# Altium PCB PCB.PcbDoc
Units mm, origin at the board's own origin, x right, y up, seen from the top; angles counter-clockwise.
Board outline 152.4 x 101.6 mm, 4 copper layers (Top Layer, Signal Layer 1, Signal Layer 2, Bottom Layer), stack 0.778 mm thick; 87 components, 52 nets, 316 pads, 98 vias.
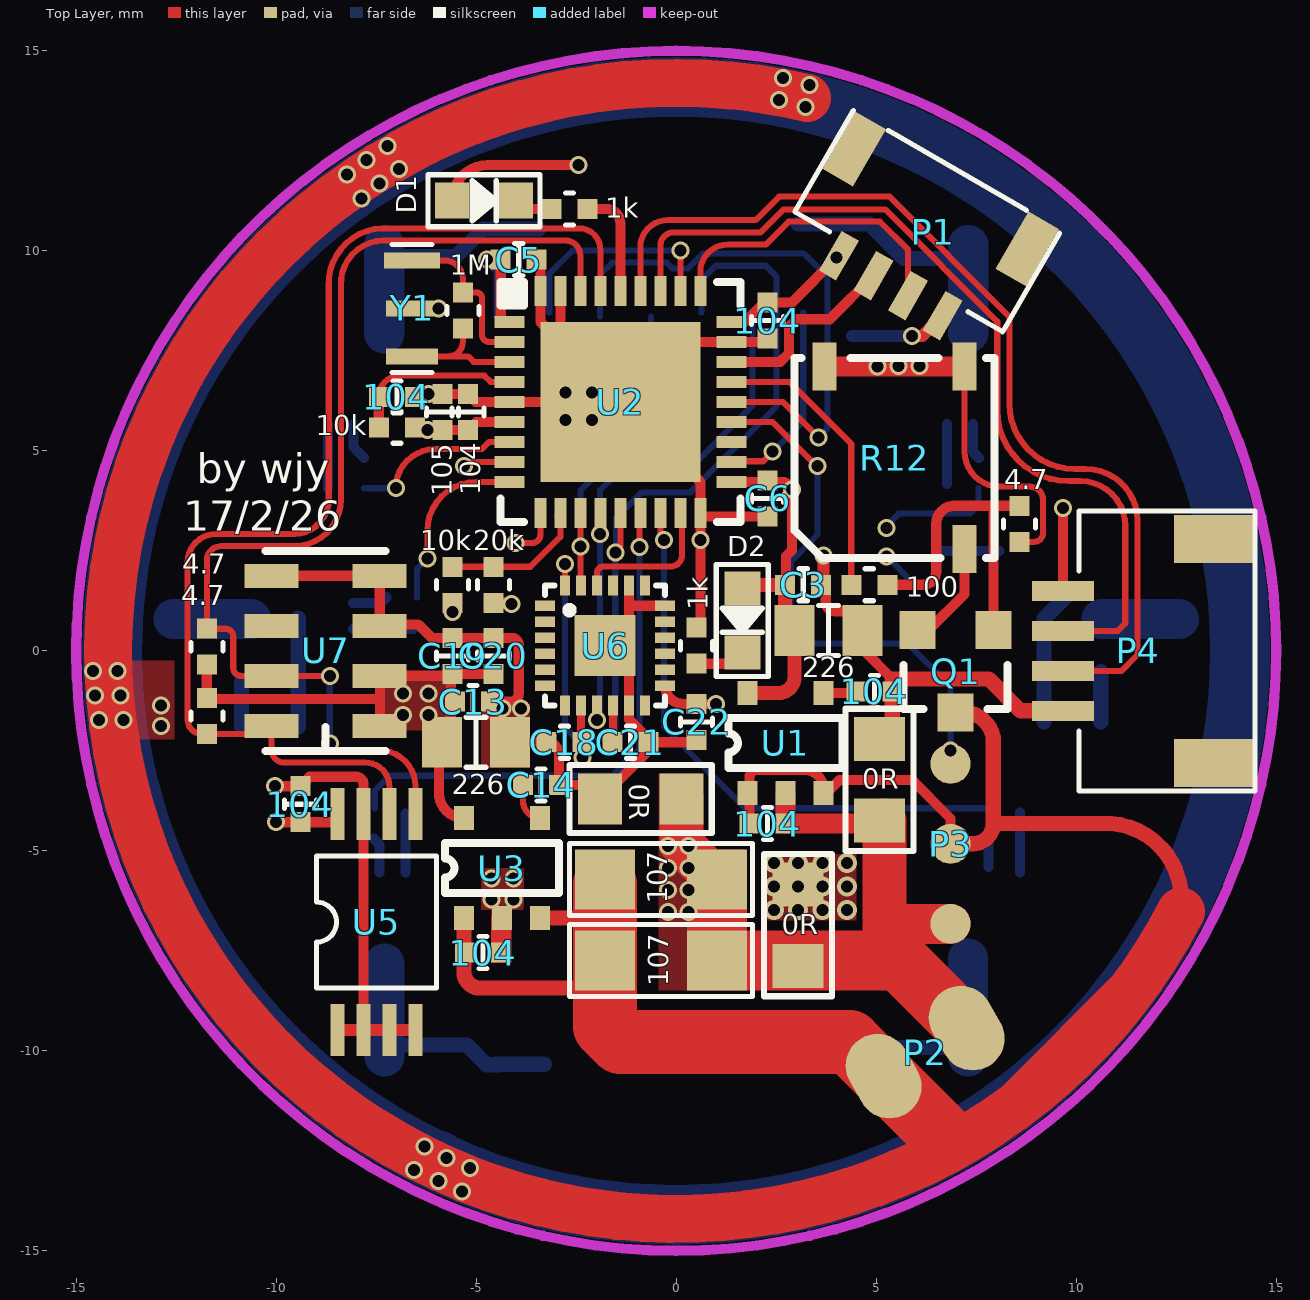
[diagram p0: Top Layer view]
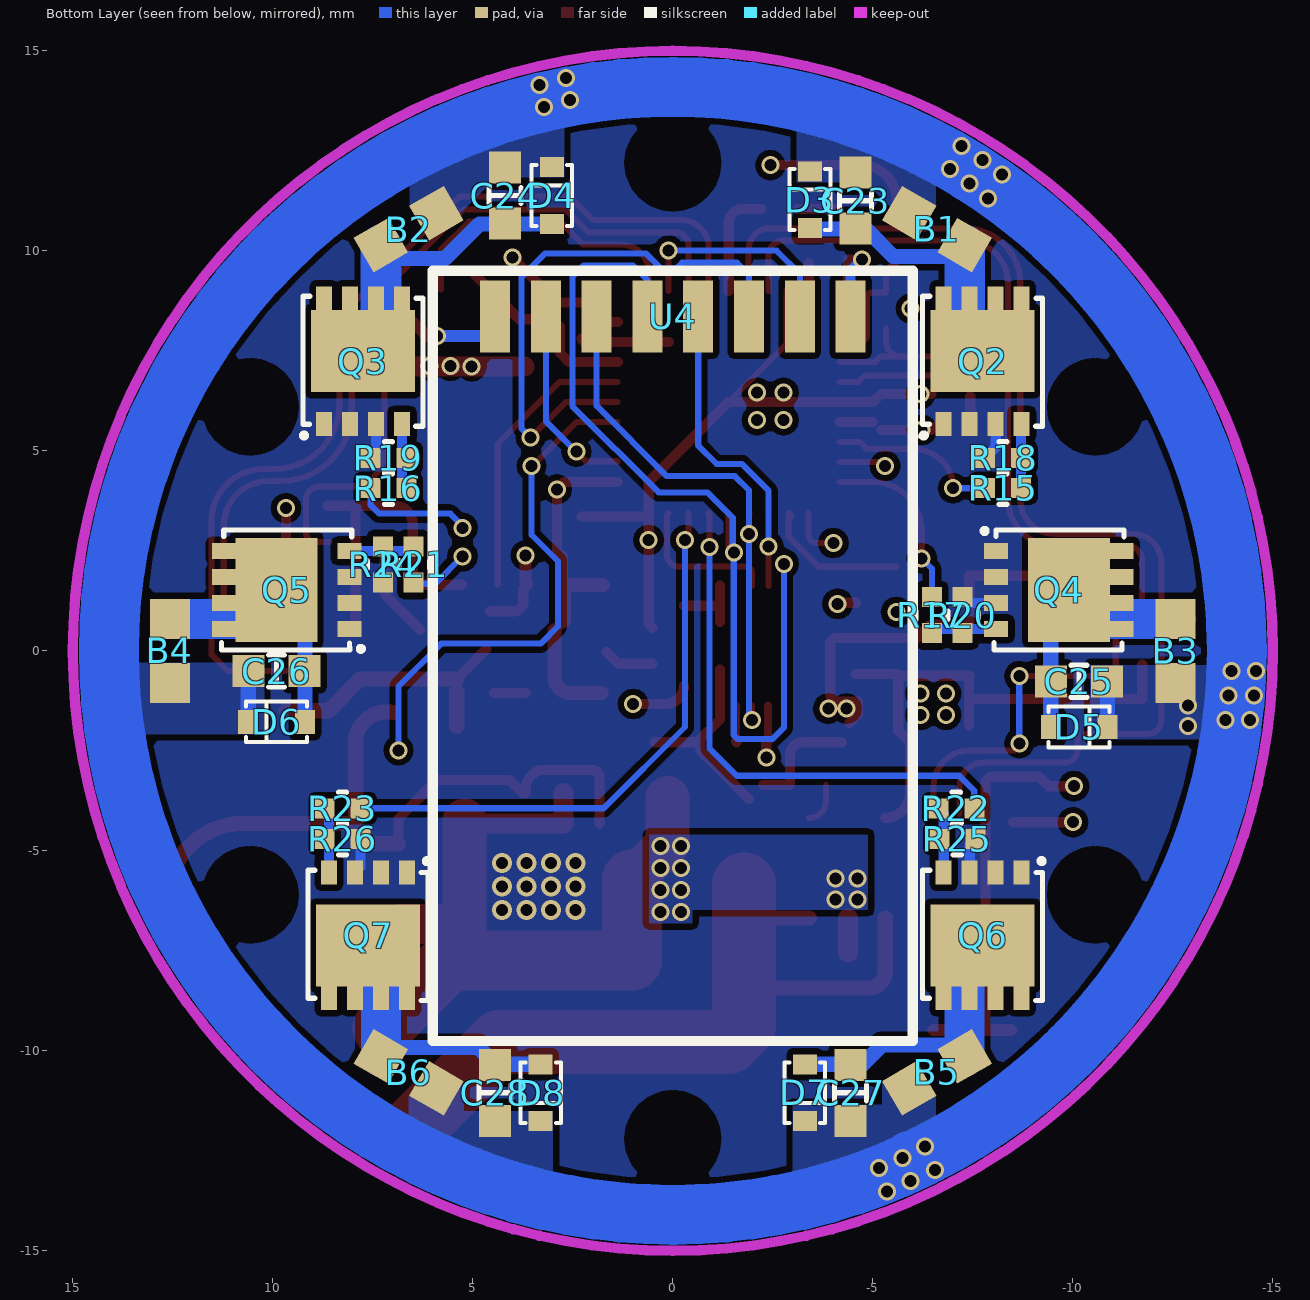
[diagram p1: Bottom Layer view, seen from below]
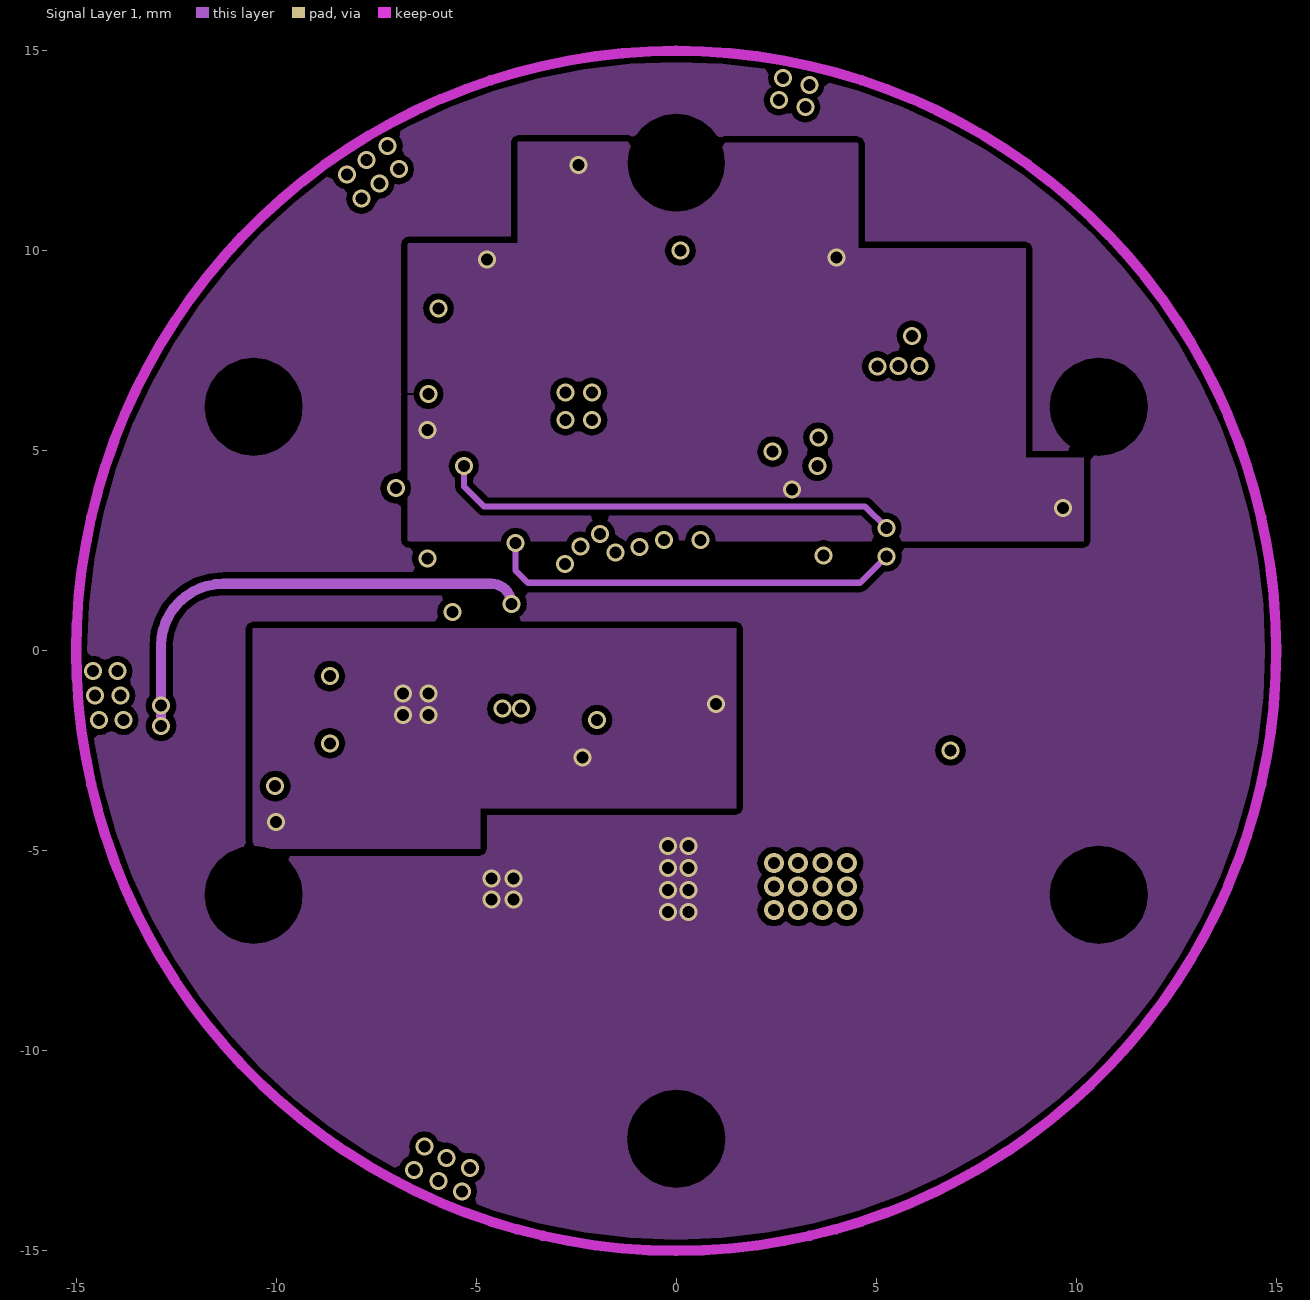
[diagram p2: Signal Layer 1]
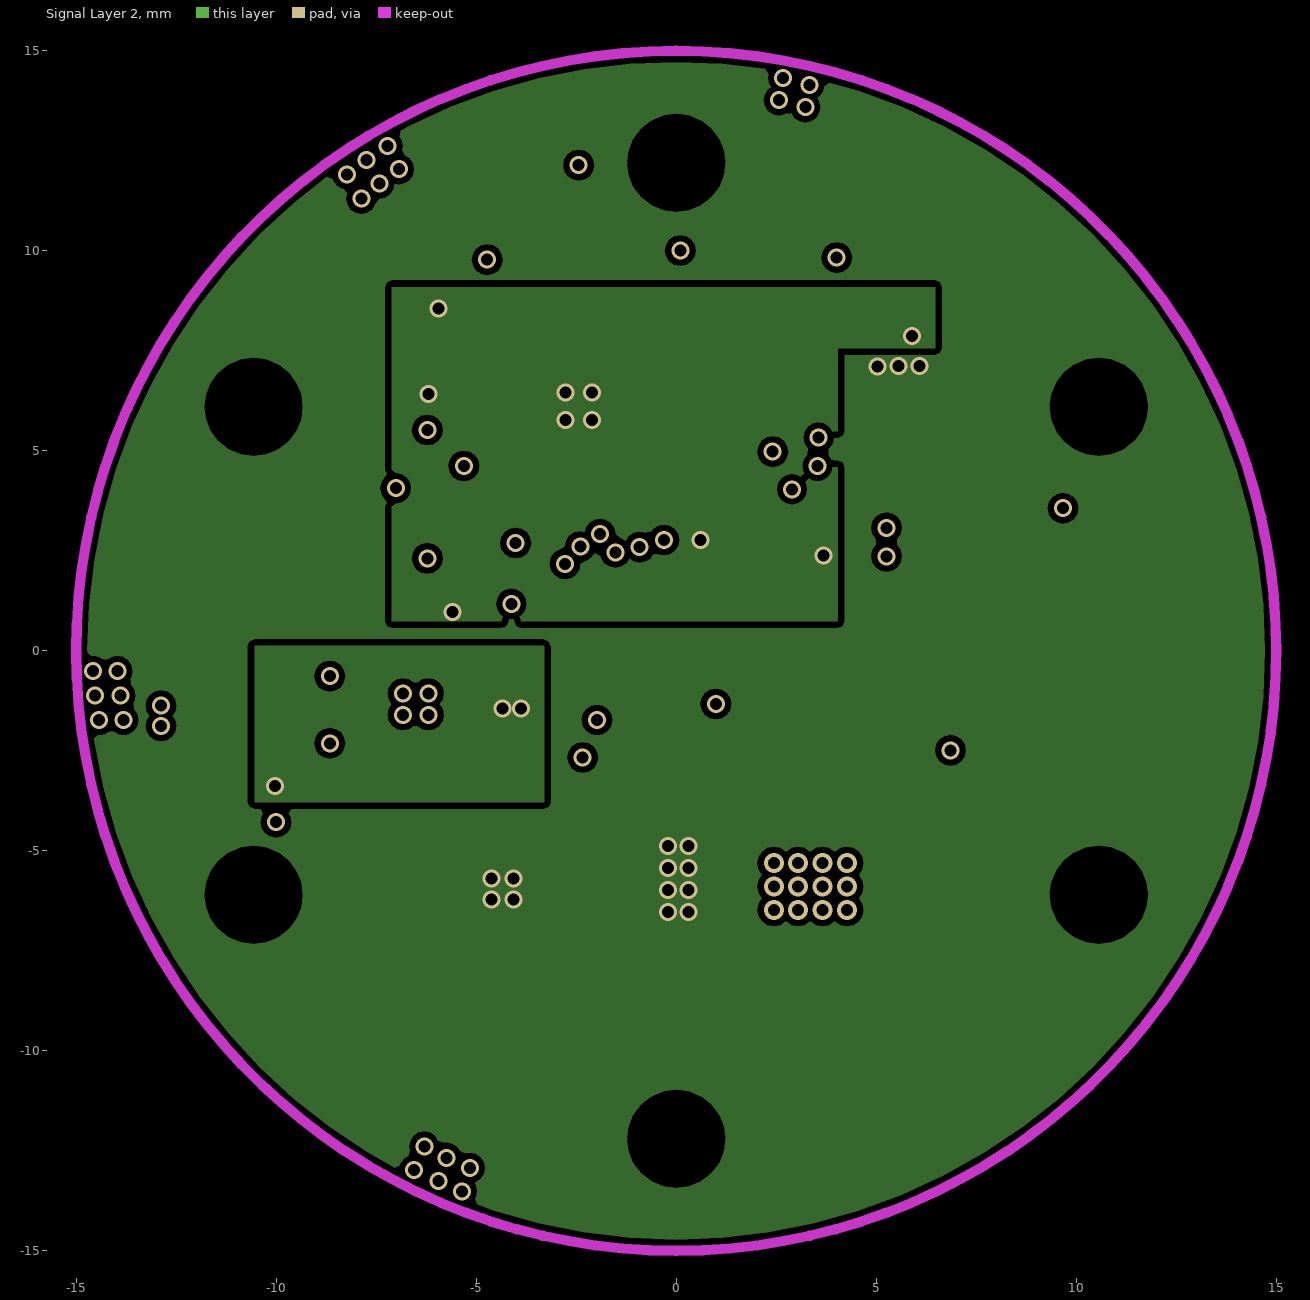
[diagram p3: Signal Layer 2]

## Layer stack, top to bottom
Top Solder: solder mask 0.0102, Solder Resist, Dk 3.5
Top Layer: signal copper 0.0356
Dielectric 1: core 0.254, FR-4, Dk 4.2
Signal Layer 1: signal copper 0.036
Dielectric 3: prepreg 0.127, Dk 4.2
Signal Layer 2: signal copper 0.036
Dielectric 2: core 0.254, Dk 4.2
Bottom Layer: signal copper 0.0356
Bottom Solder: solder mask 0.0102, Solder Resist, Dk 3.5

## Board outline
-218.567,-43.688 -66.167,-43.688 -66.167,57.912 -218.567,57.912

## Design rules (kind name [scope] priority, off if disabled: settings)
Clearance [All] p1: gap=0.152 ignorepadtopadclearanceinfootprint=FALSE except(0: Arc-Hole Track-Hole SMDPad-Hole THPad-Hole Via-Hole Fill-Hole Poly-Hole Region-Hole Text-Hole)
PolygonConnect [All] p1: connectstyle=Direct reliefconductorwidth=0.254 reliefentries=4 polygonreliefangle="90 Angle" airgapwidth=0.254
RoutingVias [All] p1: holewidth=0.3 width=0.5 viastyle="Through Hole" minholewidth=0.3 minwidth=0.4 maxholewidth=0.3 maxwidth=0.5
SolderMaskExpansion [All] p1: expansion=0.102
Width [All] p1: maxlimit=2 minlimit=0.152 preferedwidth=0.254
30 further rules are at their usual default settings.

## Classes and differential pairs
component class MCU: 0R 1K 1k 1M 4.7 10k 20k 100 104 105 107 226 C1 C3 C5 C6 C13 C14 C18 C19 C20 C21 C22 D1 D2 P1 P2 P3 P4 Q1 R12 U1 U2 U3 U4 U5 U6 U7 Y1
component class MOTOR: B1 B2 B3 B4 B5 B6 C23 C24 C25 C26 C27 C28 D3 D4 D5 D6 D7 D8 Q2 Q3 Q4 Q5 Q6 Q7 R15 R16 R17 R18 R19 R20 R21 R22 R23 R24 R25 R26

## Components (designator, comment, footprint, x,y, rotation, side; value= is the part's Value field where it differs from the comment)
0R "Res1" 0805R 5.08,-3.226 r90 top value=0R (schematic designator R6)
0R "Res1" 0805R 3.048,-6.858 r90 top value=0R (schematic designator R8)
0R "Res1" 0805R -0.889,-3.708 r180 top value=0R (schematic designator R7)
1k "Res1" R0402 0.508,0.127 r90 top value=1K (schematic designator R3)
1k "Res1" R0402 -2.667,11.049 r0 top value=1K (schematic designator R2)
1M "Res1" R0402 -5.334,8.509 r90 top value=1M (schematic designator R1)
4.7 "Res1" R0402 -11.735,0.102 r270 top value=4.7K (schematic designator R14)
4.7 "Res1" R0402 -11.735,-1.626 r90 top value=4.7K (schematic designator R13)
4.7 "Res1" R0402 8.585,3.175 r90 top value=10K (schematic designator R11)
10k "Res1" R0402 -5.588,1.651 r90 top value=10K (schematic designator R9)
10k "Res1" R0402 -6.985,5.588 r0 top value=10K (schematic designator R4)
20k "Res1" R0402 -4.572,1.651 r270 top value=20K (schematic designator R5)
100 "Res1" R0402 4.826,1.651 r0 top value=100R (schematic designator R10)
104 "Cap" C0402 -9.398,-3.835 r270 top value=100nF (schematic designator C15)
104 "Cap" C0402 -6.985,6.35 r180 top value=100nF (schematic designator C12)
104 "Cap" C0402 -4.826,-7.544 r180 top value=104 (schematic designator C10)
104 "Cap" C0402 -5.207,5.969 r270 top value=1uF (schematic designator C9)
104 "Cap" C0402 2.286,8.255 r90 top value=100nF (schematic designator C7)
104 "Cap" C0402 4.953,-1.016 r180 top value=104 (schematic designator C4)
104 "Cap" C0402 2.286,-4.318 r180 top value=104 (schematic designator C1)
105 "Cap" C0402 -5.842,5.969 r270 top value=100nF (schematic designator C8)
107 "Cap" 1206R -0.381,-7.747 r180 top value=107 (schematic designator C17)
107 "Cap" 1206R -0.381,-5.715 r180 top value=107 (schematic designator C16)
226 "Cap Pol1" C0805 -5.004,-2.286 r0 top value=22uF (schematic designator C11)
226 "Cap Pol1" C0805 3.81,0.508 r0 top value=22uF (schematic designator C2)
B1 "Motor" MOTORPAD1 -6.604,10.541 r210 bottom
B2 "Motor" MOTORPAD1 6.604,10.541 r330 bottom
B3 "Motor" MOTORPAD1 -12.573,0 r90 bottom
B4 "Motor" MOTORPAD1 12.573,0 r90 bottom
B5 "Motor" MOTORPAD1 -6.604,-10.541 r150 bottom
B6 "Motor" MOTORPAD1 6.604,-10.541 r30 bottom
C3 "Cap" C0402 3.175,1.651 r180 top value=104
C5 "Cap" C0402 -3.937,9.779 r180 top value=100nF
C6 "Cap" C0402 2.286,3.81 r90 top value=100nF
C13 "Cap" C0402 -5.08,-1.27 r180 top value=104
C14 "Cap" C0402 -3.378,-3.353 r180 top value=104
C18 "Cap" C0402 -2.794,-2.286 r180 top value=10nF
C19 "Cap" C0402 -5.588,-0.127 r270 top value=100nF
C20 "Cap" C0402 -4.572,-0.127 r270 top value=100pF
C21 "Cap" C0402 -1.143,-2.286 r180 top value=100nF
C22 "Cap" C0402 0.508,-1.778 r90 top value=100nF
C23 "Cap" c0603 -4.572,11.252 r90 bottom value=0.1uF
C24 "Cap" c0603 4.191,11.379 r90 bottom value=0.1uF
C25 "Cap" c0603 -10.16,-0.762 r180 bottom value=0.1uF
C26 "Cap" c0603 9.906,-0.508 r0 bottom value=0.1uF
C27 "Cap" c0603 -4.445,-11.049 r270 bottom value=0.1uF
C28 "Cap" c0603 4.445,-11.049 r270 bottom value=0.1uF
D1 "LED0" 0603D -4.801,11.252 r0 top
D2 "LED0" 0603D 1.651,0.762 r270 top
D3 "Diode 1N4148" SOD-523 -3.429,11.278 r270 bottom
D4 "Diode 1N4148" SOD-523 3.023,11.379 r270 bottom
D5 "Diode 1N4148" SOD-523 -10.16,-1.905 r0 bottom
D6 "Diode 1N4148" SOD-523 9.906,-1.778 r180 bottom
D7 "Diode 1N4148" SOD-523 -3.302,-11.049 r90 bottom
D8 "Diode 1N4148" SOD-523 3.302,-11.049 r90 bottom
P1 "Header 4" 1.0*4PIN/SMD 4.064,9.881 r330 top
P2 "Header 2" BATPAD 6.223,-10.033 r30 top
P3 "Header 3" PPMPAD 6.858,-4.826 r90 top
P4 "Header 4" "1.0*4PIN/SMD h" 11.557,0 r270 top
Q1 "NMOS-2" SOT23 6.985,-0.508 r180 top
Q2 "NMOS-2" "WDFN8 3.3*3.3,0.65P" -7.747,7.239 r180 bottom
Q3 "NMOS-2" "WDFN8 3.3*3.3,0.65P" 7.747,7.239 r180 bottom
Q4 "NMOS-2" "WDFN8 3.3*3.3,0.65P" -9.652,1.524 r270 bottom
Q5 "NMOS-2" "WDFN8 3.3*3.3,0.65P" 9.652,1.524 r90 bottom
Q6 "NMOS-2" "WDFN8 3.3*3.3,0.65P" -7.747,-7.112 r0 bottom
Q7 "NMOS-2" "WDFN8 3.3*3.3,0.65P" 7.62,-7.112 r0 bottom
R12 "Res1" BUZZER5X5 5.461,4.826 r90 top value=BUZZER
R15 "Res1" R0402 -8.255,4.064 r180 bottom value=10R
R16 "Res1" R0402 7.112,4.064 r180 bottom value=10R
R17 "Res1" R0402 -6.477,0.889 r270 bottom value=10R
R18 "Res1" R0402 -8.255,4.826 r0 bottom value=10K
R19 "Res1" R0402 7.112,4.826 r0 bottom value=10K
R20 "Res1" R0402 -7.239,0.889 r90 bottom value=10K
R21 "Res1" R0402 6.477,2.159 r90 bottom value=10R
R22 "Res1" R0402 -7.087,-3.937 r0 bottom value=10R
R23 "Res1" R0402 8.255,-3.937 r0 bottom value=10R
R24 "Res1" R0402 7.239,2.159 r270 bottom value=10K
R25 "Res1" R0402 -7.112,-4.699 r180 bottom value=10K
R26 "Res1" R0402 8.255,-4.699 r180 bottom value=10K
U1 "SP6205EM5-3.3" SOT-23-5 1.778,-3.556 r90 top
U2 "STM32F103T8U6" VFQFPN36 -1.397,6.223 r0 top
U3 "SP6205EM5-3.3" SOT-23-5 -5.309,-6.68 r90 top
U4 "NRF2401_SMD" NRF2401_SMD 0,9.246 r0 bottom
U5 "AT24C16" TSSOP8 -7.493,-6.782 r90 top
U6 "MPU9250" QFN24-3X3 -1.778,0.127 r0 top
U7 "MS5611" MS5611 -8.763,0 r180 top
Y1 "XTAL(3213)" Y3213 -6.604,8.56 r0 top

## Footprints (in the part's own frame and the unit in brackets; to place one, negate y for a bottom-side part, rotate by r counter-clockwise, add the part's x,y. Pads: shape width x height; smd on the part's side, far side on the other; paste and mask are expansions set on the pad)
1.0*4PIN/SMD [mm]
  rect 0.5x1.143 smd: 1(0,0) 2(1,0) 3(2,0) 4(3,0)
  rect 0.889x1.651 smd: 5(-1,2.5) 6(4,2.5)
  silkscreen extent -1.5,0.4 4.5,3.32
"1.0*4PIN/SMD h" [mm]
  rect 0.5x1.55 smd: 1(-1.5,-1.887) 2(-0.5,-1.887) 3(0.5,-1.887) 4(1.5,-1.887)
  rect 1.2x2 smd: 5(-2.8,1.887) 6(2.8,1.887)
  silkscreen extent -3.5,-1.49 3.5,2.91, body extent -3.28,-2.07 3.22,2.93, height 3.23
0603D [mm]
  rect 0.85x0.9 smd: 1(-0.8,0) 2(0.8,0)
  silkscreen extent -1.4,-0.65 1.4,0.65, body extent -0.85,-0.4 0.77,0.4, height 1.1
0805R [mm]
  rect 1.1x1.27 smd: 1(-1.016,0) 2(1.016,0)
  silkscreen extent -1.78,-0.85 1.78,0.85
1206R [mm]
  rect 1.5x1.5 smd: 1(-1.397,0) 2(1.397,0)
  silkscreen extent -2.29,-0.9 2.29,0.9, body extent -1.72,-0.79 1.48,0.81, height 0.95
BATPAD [mm]
  oval 1.6x2.2 smd: 1(-1.2,0) 2(1.2,0)
BUZZER5X5 [mm]
  rect 1.2x0.6 smd: 1(-2.286,-1.75) 2(2.286,-1.75) 2(2.286,1.75)
  silkscreen extent -2.5,-2.5 2.5,2.5
C0402 [mm] "C0402"
  rect 0.5x0.5 smd: 1(-0.45,0) 2(0.45,0)
  silkscreen extent -0.1,-0.4 0.1,0.4, body extent -0.5,-0.25 0.5,0.25, height 0.35
c0603 [mm] "C0603"
  rect 0.8x0.8 smd: 1(-0.7,0) 2(0.7,0)
  silkscreen extent -0.2,-0.4 0.2,0.4, body extent -0.75,-0.4 0.85,0.4, height 0.6
C0805 [mm] "C0805"
  rect 1x1.27 smd: 1(-0.85,0) 2(0.85,0)
  silkscreen extent -0.25,-0.62 0.25,0.62
MOTORPAD1 [mm]
  rect 1x1 smd: 1(-0.8,0) 2(0.8,0)
MS5611 [mm]
  rect 1.35x0.6 smd: 1(-1.35,1.875) 2(-1.35,0.625) 3(-1.35,-0.625) 4(-1.35,-1.875) 5(1.35,-1.875) 6(1.35,-0.625) 7(1.35,0.625) 8(1.35,1.875)
  silkscreen extent -1.5,-2.5 1.5,2.5
NRF2401_SMD [mm]
  rect 0.75x1.8 smd: 1(-4.445,0.889) 2(-3.175,0.889) 3(-1.905,0.889) 4(-0.635,0.889) 5(0.635,0.889) 6(1.905,0.889) 7(3.175,0.889) 8(4.445,0.889)
  silkscreen extent -6,-0.25 6,19
PPMPAD [mm]
  round 1 smd: 1(-2,0) 2(0,0) 3(2,0)
QFN24-3X3 [mm]
  rect 1.524x1.524 smd: 0(0,0)
  rect 0.5x0.254 smd: 1(-1.5,1) 2(-1.5,0.6) 3(-1.5,0.2) 4(-1.5,-0.2) 5(-1.5,-0.6) 6(-1.5,-1) 13(1.5,-1) 14(1.5,-0.6) 15(1.5,-0.2) 16(1.5,0.2) 17(1.5,0.6) 18(1.5,1)
  rect 0.254x0.5 smd: 7(-1,-1.5) 8(-0.6,-1.5) 9(-0.2,-1.5) 10(0.2,-1.5) 11(0.6,-1.5) 12(1,-1.5) 19(1,1.5) 20(0.6,1.5) 21(0.2,1.5) 22(-0.2,1.5) 23(-0.6,1.5) 24(-1,1.5)
  silkscreen extent -1.5,-1.5 1.5,1.5
R0402 [mm] "R0402"
  rect 0.5x0.5 smd: 1(-0.45,0) 2(0.45,0)
  silkscreen extent -0.1,-0.4 0.1,0.4, body extent -0.5,-0.25 0.5,0.25, height 0.35
SOD-523 [mm]
  rect 0.5x0.6 smd: 1(0.71,0) 2(-0.71,0)
  silkscreen extent -0.76,-0.51 0.76,0.51
SOT23 [mm] "SOT-23; 3 Leads; Body 3.1 x 2.5 mm, inc. leads (LxW max), Alternate Lead Configuration"
  rect 0.9x0.95 smd: 1(-0.95,-1.032) 2(0.95,-1.032) 3(0,1.032)
  silkscreen extent -1.3,-0.16 1.3,0.94
SOT-23-5 [mm]
  rect 0.6x0.5 smd: 1(0,0) 2(0,-0.95) 3(0,-1.9) 4(2.5,-1.9) 5(2.5,0)
  silkscreen extent 0.63,-2.38 1.87,0.48, body extent 0.25,-2.45 2.25,0.6, height 0.51
TSSOP8 [mm]
  rect 1.3x0.35 smd: 1(-2.7,0.975) 2(-2.7,0.325) 3(-2.7,-0.325) 4(-2.7,-0.975) 5(2.7,-0.975) 6(2.7,-0.325) 7(2.7,0.325) 8(2.7,0.975)
  silkscreen extent -1.65,-1.5 1.65,1.5
VFQFPN36 [mm]
  rect 4x4 smd: 0(0,0)
  rect 0.75x0.3 smd: 1(-2.775,2) 2(-2.775,1.5) 3(-2.775,1) 4(-2.775,0.5) 5(-2.775,0) 6(-2.775,-0.5) 7(-2.775,-1) 8(-2.775,-1.5) 9(-2.775,-2) 19(2.775,-2) 20(2.775,-1.5) 21(2.775,-1) 22(2.775,-0.5) 23(2.775,0) 24(2.775,0.5) 25(2.775,1) 26(2.775,1.5) 27(2.775,2)
  rect 0.3x0.75 smd: 10(-2,-2.775) 11(-1.5,-2.775) 12(-1,-2.775) 13(-0.5,-2.775) 14(0,-2.775) 15(0.5,-2.775) 16(1,-2.775) 17(1.5,-2.775) 18(2,-2.775) 28(2,2.775) 29(1.5,2.775) 30(1,2.775) 31(0.5,2.775) 32(0,2.775) 33(-0.5,2.775) 34(-1,2.775) 35(-1.5,2.775) 36(-2,2.775)
  silkscreen extent -3,-3 3,3
"WDFN8 3.3*3.3,0.65P" [mm] "EMB06N03V"
  rect 0.4x0.6 smd: 1(0.975,-1.572) 2(-0.975,-1.572) 2(-0.325,-1.572) 2(0.325,-1.572) 3(-0.975,1.572) 3(-0.325,1.572) 3(0.325,1.572) 3(0.975,1.572)
  rect 2.6x2.05 smd: 3(-0.001,0.258)
  silkscreen extent -1.5,-1.88 1.5,1.63, body extent -1.47,-1.47 1.52,1.52, height 0.9
Y3213 [mm]
  rect 1.4x0.4 smd: 1(0,1.2)
  rect 1.3x0.4 smd: 2(0,0) 3(0,-1.2)
  silkscreen extent -0.5,-1.6 0.5,1.6

## Part data
0R 0R 0R 1k 1k 1M 4.7 4.7 4.7 10k 10k 20k 100 R12 R15 R16 R17 R18 R19 R20 R21 R22 R23 R24 R25 R26: "Resistor", LatestRevisionDate=17-Jul-2002, LatestRevisionNote="Re-released for DXP Platform.", PackageReference=AXIAL-0.3, Published=8-Jun-2000, Publisher="Altium Limited"
  0R 0R 0R 1k 1k 1M 10k 10k 20k: PackageDescription="Axial Device, Thru-Hole; 2 Leads; 0.3 in Pin Spacing"
104 104 104 104 104 104 104 105 107 107 C3 C5 C6 C13 C14 C18 C19 C20 C21 C22 C23 C24 C25 C26 C27 C28: "Capacitor", LatestRevisionDate=17-Jul-2002, LatestRevisionNote="Re-released for DXP Platform.", PackageReference=RAD-0.3, Published=8-Jun-2000, Publisher="Altium Limited"
226 226: "Polarized Capacitor (Radial)", LatestRevisionDate=17-Jul-2002, LatestRevisionNote="Re-released for DXP Platform.", PackageReference=RB7.6-15, Published=8-Jun-2000, Publisher="Altium Limited"
B1 B2 B3 B4 B5 B6: "Motor, General Kind", LatestRevisionDate=17-Jul-2002, LatestRevisionNote="Re-released for DXP Platform.", PackageReference=RB5-10.5, Published=24-Mar-1999, Publisher="Altium Limited"
D1 D2: "Typical INFRARED GaAs LED", LatestRevisionDate=08-Jul-2005, LatestRevisionNote="Mech Layer 1 removed.", PackageDescription="LED; 2 Leads", PackageReference=LED-0, Published=8-Jun-2000, Publisher="Altium Limited"
D3 D4 D5 D6 D7 D8: "High Conductance Fast Diode", Code_JEDEC=DO-204-AH, ComponentLink1Description="Manufacturer Link", ComponentLink1URL=http://www.fairchildsemi.com/, ComponentLink2Description=Datasheet, ComponentLink2URL=http://www.fairchildsemi.com/ds/1N%2F1N4148.pdf, DatasheetDocument=1997, LatestRevisionDate=17-Jul-2002, LatestRevisionNote="Re-released for DXP Platform.", PackageReference=DO-35, Published=8-Jun-2000, Publisher="Altium Limited"
P1 P4: "Header, 4-Pin", LatestRevisionDate=17-Jul-2002, LatestRevisionNote="Re-released for DXP Platform.", Publisher="Altium Limited"
P2: "Header, 2-Pin", LatestRevisionDate=17-Jul-2002, LatestRevisionNote="Re-released for DXP Platform.", Publisher="Altium Limited"
P3: "Header, 3-Pin", LatestRevisionDate=17-Jul-2002, LatestRevisionNote="Re-released for DXP Platform.", Publisher="Altium Limited"
Q1 Q2 Q3 Q4 Q5 Q6 Q7: "N-Channel Power MOSFET", Code_JEDEC=TO-220-AB, ComponentLink1Description="Manufacturer Link", ComponentLink1URL=http://www.irf.com/, DatasheetDocument=PD-9.814, LatestRevisionDate=17-Jul-2002, LatestRevisionNote="Re-released for DXP Platform.", Note="Pin 2 is electrically connected to pin 4.", PackageReference=TO-220AB, Published=8-Jun-2000, Publisher="Altium Limited"
U1 U3: library part SP6205, "AD3330"
Y1: "Crystal Oscillator", LatestRevisionDate=17-Jul-2002, LatestRevisionNote="Re-released for DXP Platform.", PackageReference=R38, Published=8-Jun-2000, Publisher="Altium Limited"

## Free pads (board coordinates)
  round 1.524 hole 2.1: 0(-10.566,-6.1) 0(-10.566,6.1) 0(0,-12.2) 0(0,12.2) 0(10.566,-6.1) 0(10.566,6.1)

## Via types
v1: diameter 0.45, hole 0.3, Top Layer to Bottom Layer, 86 vias
v2: diameter 0.5, hole 0.3, Top Layer to Bottom Layer, 12 vias

## Nets (pads, with @x,y where several pads share a name; then routed paths per layer and width w, separated by ;. In a path a pad name is that pad's centre, name@x,y a point inside that pad or via, vN(x,y) a via of type N, cw(c..) or ccw(c..) an arc to the next point about the centre after c; other vN are vias at no path point)
3.3VA: 4.7.2@-11.735,-0.348 4.7.2@-11.735,-1.176 104.2@-9.398,-4.285 226.1@-5.854,-2.286 C13.2 C18.1 C19.2 C20.2 C22.2 U3.5 U5.8 U6.8 U6.13 U7.1 U7.2 | length 17.6
  Top Layer w0.2: C18.1@-2.378,-2.252 U6.8
  Top Layer w0.254: 4.7.2@-11.735,-0.348 -11.735,-1.176 -11.735,-1.204 -7.402,-1.204 ; v1(-10.008,-4.285) -9.398,-4.285 U5.8@-8.509,-4.285 ; U7.2 -5.636,-0.625 -5.636,-1.992 -5.93,-2.286 -5.93,-3.559 ccw(c-5.309,-3.559) U3.5 ; U7.1@-7.402,-1.864 -7.402,-1.204 ; U7.2@-7.402,-0.636 -7.402,-1.204 ; C19.2 C20.2 ; C18.1@-2.378,-2.252 C18.1 -2.337,-2.293 v1(-2.337,-2.667) ; U6.13 ccw(c0.177,-0.873) 0.177,-1.328 C22.2 v1(0.991,-1.328)
  other v1: -6.833,-1.6 -6.198,-1.6 -6.833,-1.067 -6.198,-1.067
3.3VD: 10k.2@-6.535,5.588 104.2@2.286,8.705 104.2@-5.207,5.519 105.2 226.1@2.96,0.508 C3.2 C5.2 C6.2 D1.1 D2.1 P1.1 P4.1 U1.5 U2.1 U2.6 U2.19 U2.27 U4.1 | length 23.4
  Top Layer w0.254: 10k.2@-6.535,5.555 10k.2@-6.535,5.588 ; 10k.2@-6.466,5.519 105.2 104.2@-5.207,5.519 ; D1.1 cw(c-4.712,11.252) -4.712,12.141 v1(-2.438,12.141) ; 104.2@-5.003,5.723 U2.6 ; v1(-4.724,9.779) C5.2 U2.1@-4.387,8.306 ; U2.19 2.711,4.223 v1(2.896,4.039) 2.896,2.515 2.743,2.362 C3.2@2.743,1.669 ; U2.27 1.721,8.223 2.203,8.705 2.286,8.705 2.888,8.705 P1.1 ; 226.1@2.743,0.725 226.1@2.96,0.508 ; P4.1 v1(9.67,3.564)
  Top Layer w0.35: D2.1@1.74,1.651 C3.2 226.1@2.725,0.743 ; U1.5 2.551,-1.056 ccw(c2.551,-0.647) 2.96,-0.647 226.1@2.96,0.508
  Bottom Layer w0.254: v1(-4.724,9.779) -4.445,9.5 U4.1
  other v1: -6.223,5.519 4.013,9.83
AGND: 0R.2@-1.905,-3.708 104.1@-9.398,-3.385 226.2@-4.154,-2.286 C13.1 C14.1 C18.2 C19.1 C20.1 C21.1 C22.1 U5.1 U5.2 U5.3 U5.4 U5.7 U6.0 U6.11 U6.18 U6.20 U7.3 U7.4 U7.5 | length 30.6
  Top Layer w0.254: U7.5 U7.4 U7.3 -7.378,0.66 -6.452,0.66 -6.114,0.323 C19.1 C20.1 -4.108,0.323 cw(c-4.108,0.152) -3.937,0.152 -3.937,-1.067 cw(c-4.14,-1.067) -4.14,-1.27 C13.1 -4.63,-1.593 226.2@-4.42,-1.803 ; v1(-10.026,-3.385) -9.398,-3.385 -9.162,-3.15 -8.001,-3.15 cw(c-8.001,-3.333) -7.818,-3.333 U5.7 U5.2 ; 226.2@-4.23,-2.286 C18.2 cw(c-3.244,-2.602) -2.928,-2.602 C14.1 0R.2@-2.261,-3.353 ; 0R.2@-1.905,-3.708 -0.693,-2.496 C21.1 C22.1@0.45,-2.286 ; U6.0@-1.178,-0.473 U6.11 -1.178,-1.718 C21.1@-0.651,-2.244 ; U6.0@-1.178,0.727 U6.20 ; -1.169,1.127 U6.18
  Top Layer w0.3: U5.1 U5.2 U5.4
  other v1: -4.343,-1.448 -3.886,-1.448
BAT: 20k.2 104.2@1.836,-4.318 104.2@-5.276,-7.544 107.2 B1.1 B2.1 B3.1 B4.1 B5.1 B6.1 C23.2 C24.2 C25.2 C26.2 C27.2 C28.2 D3.2 D4.2 D5.2 D6.2 D7.2 D8.2 P2.1 P3.2 Q1.3 U1.1 U1.3 U3.1 U3.3 | length 211.8
  Top Layer w0.254: 20k.2 v1@-4.122,1.201 ; 104.2@1.836,-4.318 1.836,-3.142 cw(c2.002,-3.142) 2.002,-2.977 3.281,-2.977 cw(c3.19,-3.465) 3.678,-3.373 cw(c3.19,-3.465) U1.3 3.759,-3.556 4.089,-3.226 5.893,-3.226 6.858,-4.191 P3.2
  Top Layer w0.381: U3.1 -5.309,-8.026 ccw(c-4.902,-8.026) -4.902,-8.433 -2.464,-8.433 107.2@-1.778,-7.747 ; U3.3 -1.829,-6.68 ; P3.2 7.417,-4.826 ccw(c7.417,-4.318) 7.925,-4.318 ; Q1.3 cw(c7.145,-2.319) 7.925,-2.159 7.925,-4.318 ; 7.518,-11.786 11.959,-7.345 ; 12.629,-6.198 ccw(c10.731,-6.21) 10.871,-4.318 7.925,-4.318
  Top Layer w1.2: 3.274,13.817 ccw(c0,0) 12.618,-6.513
  Top Layer w1.6: 107.2@-1.778,-5.842 -1.778,-7.747 -1.778,-9.398 -1.397,-9.779 4.33,-9.779 P2.1 6.586,-12.036
  Signal Layer 1 w0.254: v1(-12.878,-1.88) v1(-12.878,-1.372) -12.878,0.127 cw(c-11.328,0.127) -11.328,1.676 -4.623,1.676 cw(c-4.623,1.176) v1(-4.122,1.176)
  Bottom Layer w0.381: D5.2 C25.2@-10.87,-0.772 ; D6.2 C26.2@10.616,-0.518
  Bottom Layer w1.27: v1@-5.911,-12.639 v1@-5.702,-12.849
  Bottom Layer w1.5: 14.1,0 ccw(c0,0) 14.1,0
  other v1: -5.359,-13.513 -5.944,-13.259 -6.553,-12.979 -5.156,-12.929 -5.74,-12.675 -6.299,-12.395 -14.427,-1.727 -13.818,-1.727 -14.529,-1.118 -13.894,-1.118 -14.58,-0.508 -13.97,-0.508 -7.874,11.303 -7.417,11.684 -8.23,11.913 -6.934,12.04 -7.747,12.268 -7.214,12.624 3.226,13.589 2.565,13.767 3.327,14.148 2.667,14.326
BAT_AD: 10k.2@-5.588,2.101 20k.1 U2.11 | length 3.7
  Top Layer w0.152: 10k.2@-5.588,2.101 20k.1 -3.645,2.101 -2.897,2.849 U2.11 U2.11@-2.968,3.377
BUZZER: 100.1 U2.24 | length 7.2
  Top Layer w0.152: U2.24 2.827,6.723 4.376,5.174 100.1
DGND: 0R.2@5.08,-2.21 1k.2@0.508,0.577 10k.1@-5.588,1.201 104.1@2.286,7.805 104.1@5.403,-1.016 104.1@-5.207,6.419 104.1@-6.535,6.35 105.1 226.2@4.66,0.508 C3.1 C5.1 C6.1 P1.4 P4.4 U2.0 U2.5 U2.18 U2.26 U2.35 U2.36 U4.8 Y1.2 | length 32.5
  Top Layer w0.152: U2.0@-2.897,7.723 U2.0
  Top Layer w0.254: 104.1@-6.466,6.419 105.1 -5.207,6.419 -5.011,6.223 U2.5 U2.0 0.603,4.223 U2.18 0.603,0.672 1k.2@0.508,0.577 ; C5.1@-3.397,9.689 U2.36 -3.397,8.223 -2.897,7.723 U2.35 ; U2.0@0.103,7.723 U2.26 2.204,7.723 104.1@2.286,7.805 ; U2.18@0.691,3.36 C6.1 ; C3.1 3.739,1.537 3.739,1.214 ccw(c3.962,1.214) 3.962,0.991 226.2@4.572,0.991 ; 226.2@4.66,0.039 5.403,-0.704 104.1@5.403,-1.016
  Top Layer w0.3: C3.1@3.683,1.709 v1(3.683,2.388) ; v1(5.893,7.874) 6.155,7.874 P1.4
  Top Layer w0.381: 0R.2@5.403,-1.887 104.1@5.403,-1.016 ; 5.403,-0.704 7.816,-0.704 8.612,-1.5 P4.4
  Bottom Layer w0.3: U4.8@4.394,7.874 v1(5.893,7.874)
  other v1: -5.588,0.965 0.603,2.769 -2.769,5.766 -2.108,5.766 -6.198,6.419 -2.769,6.452 -2.108,6.452 -5.944,8.56
ECHO: P4.3 U2.31 | length 24.6
  Top Layer w0.152: U2.31 -0.897,10.084 cw(c-0.215,10.084) -0.215,10.766 1.986,10.766 2.573,11.354 5.334,11.354 8.331,8.357 8.331,6.172 ccw(c9.957,6.172) 9.957,4.547 10.236,4.547 cw(c10.236,3.251) 11.532,3.251 11.532,-0.102 11.133,-0.5 P4.3
GND: 0R.1 4.7.1@8.585,2.725 104.1@2.736,-4.318 104.1@-4.376,-7.544 107.1 P2.2 P3.1 R12.2 U1.2 U3.2 | length 29.9
  Top Layer w0.152: R12.2@7.211,7.112 7.211,4.981 ccw(c8.088,4.981) 8.088,4.104 8.839,4.104 cw(c8.845,3.779) 9.169,3.785 9.169,2.946 cw(c8.948,2.946) 8.948,2.725 4.7.1@8.585,2.725
  Top Layer w0.5: 104.1@-4.376,-7.544 U3.2@-4.376,-6.698 ; 104.1@2.728,-4.31 U1.2 ; 104.1@2.736,-4.318 0R.1@5.004,-4.318 ; R12.2@3.711,7.112 R12.2@7.211,7.112
  Top Layer w1: 5.302,-6.826 P3.1
  Top Layer w1.1: 0R.1@0.127,-3.683 0.127,-4.826 107.1@1.016,-5.715 ; 5.207,-7.747 0R.1@5.207,-4.242
  Top Layer w1.5: 107.1@1.016,-5.715 1.016,-7.747 5.207,-7.747 5.302,-7.747 ; 5.576,-7.747 P2.2
  other v1: -0.203,-6.534 0.305,-6.534 -4.623,-6.223 -4.064,-6.223 -0.203,-5.982 0.305,-5.982 -4.623,-5.69 -4.064,-5.69 -0.203,-5.429 0.305,-5.429 -0.203,-4.877 0.305,-4.877 5.029,7.112 5.559,7.12 6.088,7.12
I2C_SCL: 4.7.1@-11.735,-2.076 U2.33 U5.6 U7.8 | length 29.5
  Top Layer w0.152: U7.8@-10.314,-2.076 -11.735,-2.076 -11.869,-2.076 cw(c-11.869,-1.731) -12.213,-1.731 -12.213,2.213 cw(c-11.505,2.213) -11.505,2.921 -9.55,2.921 ccw(c-9.55,3.784) -8.687,3.784 -8.687,9.144 cw(c-7.305,9.18) -7.341,10.562 -2.42,10.562 cw(c-2.431,10.029) -1.897,10.018 U2.33 ; U7.8 -10.113,-2.485 ccw(c-9.804,-2.485) -9.804,-2.794 -7.772,-2.794 cw(c-7.772,-3.398) -7.168,-3.398 U5.6
I2C_SDA: 4.7.1@-11.735,0.552 U2.34 U5.5 U7.7 | length 28.2
  Top Layer w0.152: v1(-8.661,-2.311) -8.661,-2.362 -8.534,-2.489 -7.417,-2.489 cw(c-7.417,-3.388) -6.518,-3.388 U5.5 ; v1@-8.661,-0.625 U7.7 -10.881,-0.625 cw(c-10.881,-0.432) -11.074,-0.432 -11.074,0.356 ccw(c-11.27,0.356) -11.27,0.552 -11.735,0.552 -11.735,2.261 cw(c-11.379,2.261) -11.379,2.616 -9.55,2.616 ccw(c-9.55,3.785) -8.382,3.785 -8.382,9.144 cw(c-7.304,9.18) -7.341,10.258 -2.769,10.258 cw(c-2.771,9.883) -2.397,9.881 U2.34
  Bottom Layer w0.152: v1(-8.661,-2.311) v1(-8.661,-0.635)
LED: 1k.2@-2.217,11.049 U2.32 | length 2.7
  Top Layer w0.254: 1k.2@-2.217,11.049 -1.753,11.049 cw(c-1.753,10.693) -1.397,10.693 U2.32
MOTOR1: R15.1 U2.7 | length 4.3
  Top Layer w0.152: v1(-7.01,4.064) cw(c-6.034,4.064) -6.034,5.04 -4.862,5.04 -4.68,5.223 U2.7
  Bottom Layer w0.152: R15.1 v1(-7.01,4.064)
MOTOR2: R16.1 U2.8 | length 15.7
  Top Layer w0.152: v1(-5.309,4.623) -5.208,4.723 U2.8
  Signal Layer 1 w0.152: v1(-5.309,4.623) -5.309,4.115 -4.801,3.607 4.724,3.607 v1(5.258,3.073)
  Bottom Layer w0.152: v1@5.207,3.073 5.563,3.429 7.341,3.429 7.562,3.65 R16.1
MOTOR3: R17.1 U2.9 | length 4.5
  Top Layer w0.152: v1(-6.223,2.311) -6.223,2.997 cw(c-4.997,2.997) -4.997,4.223 U2.9
  Bottom Layer w0.152: R17.1 -6.477,2.057 v1(-6.223,2.311)
MOTOR4: R21.1 U2.10 | length 13.2
  Top Layer w0.152: v1(-4.013,2.692) -3.607,2.692 ccw(c-3.607,2.902) -3.397,2.902 U2.10
  Signal Layer 1 w0.152: v1(-4.013,2.692) -4.013,2.007 -3.708,1.702 4.597,1.702 v1(5.258,2.362)
  Bottom Layer w0.152: v1(5.258,2.362) 5.944,1.676 6.444,1.676 R21.1
MOTOR5: R22.1 U2.15 | length 13.4
  Top Layer w0.152: v1(-0.914,2.591) -0.914,3.431 U2.15
  Bottom Layer w0.152: R22.1 -7.537,-3.498 -7.163,-3.124 -1.6,-3.124 -0.914,-2.438 v1(-0.914,2.591)
MOTOR6: R23.1 U2.16 | length 14.5
  Top Layer w0.152: U2.16 -0.397,2.683 -0.311,2.769 v1(-0.305,2.769)
  Bottom Layer w0.152: v1(-0.305,2.769) -0.305,-1.905 1.727,-3.937 R23.1
MPU_NSS: U2.17 U6.22 | length 3.8
  Top Layer w0.152: U6.22 -1.978,1.959 cw(c-1.816,1.946) -1.803,2.108 ; -1.829,2.108 -0.146,2.108 ccw(c-0.146,2.403) 0.149,2.403 0.149,3.402 U2.17
NetB1_2: B1.2 C23.1 D3.1 Q2.3 | length 6.3
  Bottom Layer w0.381: B1.2@-7.214,9.855 -5.512,9.855 -4.825,10.542 D3.1@-3.429,10.542
  Bottom Layer w1.016: Q2.3@-7.297,7.946 B1.2
NetB2_2: B2.2 C24.1 D4.1 Q3.3 | length 6.8
  Bottom Layer w0.381: D4.1@3.048,10.669 4.832,10.669 5.697,9.804 7.297,9.804 B2.2@7.315,9.804
  Bottom Layer w1.016: Q3.3@7.297,7.949 7.297,9.804 B2.2
NetB3_2: B3.2 C25.1 D5.1 Q4.3 | length 4.7
  Bottom Layer w0.381: D5.1 Q4.3@-9.45,0.813
  Bottom Layer w1: B3.2 Q4.3@-10.636,0.8
NetB4_2: B4.2 C26.1 D6.1 Q5.3 | length 5.5
  Bottom Layer w0.381: D6.1 9.196,0.808 Q5.3@9.91,1.523
  Bottom Layer w1: Q5.3@10.633,0.8 B4.2
NetB5_2: B5.2 C27.1 D7.1 Q6.3 | length 6.6
  Bottom Layer w0.381: B5.2@-7.315,-9.855 -7.297,-9.855 -5.232,-9.855 -4.739,-10.349 C27.1 ; C27.1@-4.52,-10.339 D7.1
  Bottom Layer w1: B5.2 -7.297,-9.855 Q6.3@-7.297,-7.822
NetB6_2: B6.2 C28.1 D8.1 Q7.3 | length 6.7
  Bottom Layer w0.381: D8.1 4.435,-10.339 4.859,-9.915 7.071,-9.915 B6.2
  Bottom Layer w1: B6.2 Q7.3@7.297,-7.692
NetC4_2: 104.2@4.503,-1.016 U1.4 | length 0.8
  Top Layer w0.254: U1.4 104.2@4.463,-1.056
NetC14_2: C14.2 U3.4 | length 1.1
  Top Layer w0.152: C14.2 -3.828,-3.761 ccw(c-3.409,-3.761) U3.4
NetC21_2: C21.2 U6.10 | length 0.9
  Top Layer w0.2: C21.2@-1.578,-2.271 U6.10
  Top Layer w0.254: C21.2 C21.2@-1.578,-2.271
NetD1_2: 1k.1@-3.117,11.049 D1.2 | length 1
  Top Layer w0.254: D1.2@-4.153,11.049 1k.1@-3.117,11.049
NetD2_2: 1k.1@0.508,-0.323 D2.2 | length 1.3
  Top Layer w0.254: 1k.1@0.508,-0.323 1.366,-0.323 D2.2
NetQ1_1: 4.7.2@8.585,3.625 100.2 Q1.1 | length 8.1
  Top Layer w0.152: 7.925,3.625 7.935,3.615
  Top Layer w0.254: 100.2 6.172,1.651 ccw(c6.172,1.981) 6.502,1.981 6.502,3.175 cw(c6.952,3.175) 6.952,3.625 7.925,3.625 4.7.2@8.636,3.625 ; Q1.1 7.935,3.615
NetQ1_2: Q1.2 R12.1 | length 2.4
  Top Layer w0.254: Q1.2@6.315,0.524 7.211,1.42 R12.1
NetQ2_1: Q2.1 R15.2 R18.1 | length 1.6
  Bottom Layer w0.254: R15.2 R18.1 Q2.1@-8.705,5.65
NetQ3_1: Q3.1 R16.2 R19.1 | length 1.5
  Bottom Layer w0.254: R16.2@6.772,4.174 Q3.1
NetQ4_1: Q4.1 R17.2 R20.1 | length 1.5
  Bottom Layer w0.254: Q4.1 R17.2@-6.587,0.549
NetQ5_1: Q5.1 R21.2 R24.1 | length 1.5
  Bottom Layer w0.254: R21.2@6.587,2.499 Q5.1
NetQ6_1: Q6.1 R22.2 R25.1 | length 1.5
  Bottom Layer w0.254: Q6.1 R22.2@-6.772,-4.072
NetQ7_1: Q7.1 R23.2 R26.1 | length 1.5
  Bottom Layer w0.254: Q7.1 R23.2@8.595,-4.047
NRF_CE: U2.29 U4.2 | length 5.5
  Top Layer w0.152: v1(0.102,10.008) 0.103,10.006 U2.29
  Bottom Layer w0.152: U4.2@-3.175,8.458 -3.175,9.423 -2.591,10.008 v1(0.102,10.008)
NRF_IRQ: U2.20 U4.7 | length 4.9
  Top Layer w0.152: U2.20 1.378,4.739 2.173,4.739 v1(2.413,4.978)
  Bottom Layer w0.152: v1(2.413,4.978) 3.175,5.74 U4.7@3.175,8.458
NRF_NSS: U2.23 U4.3 | length 14
  Top Layer w0.152: U2.23 2.667,6.223 v1(3.556,5.334)
  Bottom Layer w0.152: U4.3 -1.905,9.398 -1.6,9.703 -0.235,9.703 -0.086,9.554 0.289,9.554 0.667,9.931 3.198,9.931 3.779,9.351 3.779,5.557 v1(3.556,5.334)
NRST: 10k.1@-7.435,5.588 104.2@-7.435,6.35 U2.4 | length 4.4
  Top Layer w0.152: 104.2@-7.435,6.35 cw(c-6.905,6.35) -6.905,6.88 -4.798,6.88 -4.64,6.723 U2.4
  Top Layer w0.254: 10k.1@-7.435,5.588 104.2@-7.435,6.35
OSC_IN: 1M.2 U2.2 Y1.1 | length 4.1
  Top Layer w0.152: Y1.1 -5.797,9.76 cw(c-5.797,9.296) -5.334,9.296 1M.2 -4.997,8.959 cw(c-4.997,8.818) -4.855,8.818 -4.855,7.903 ccw(c-4.675,7.903) -4.675,7.723 U2.2
OSC_OUT: 1M.1 U2.3 Y1.3 | length 3.4
  Top Layer w0.152: Y1.3 -5.696,7.36 ; 1M.1 -5.334,7.722 cw(c-5.696,7.722) -5.696,7.36 ; U2.3 -5.064,7.223 -5.201,7.36 -5.696,7.36
PGND: 0R.2@3.048,-5.842 Q2.2 Q3.2 Q4.2 Q5.2 Q6.2 Q7.2 R18.2 R19.2 R20.2 R24.2 R25.2 R26.2 | length 4.4
  Bottom Layer w0.254: Q4.2@-8.08,1.199 -7.379,1.199 R20.2 ; Q2.2@-8.072,5.667 -8.072,5.093 R18.2 ; R25.2 -7.422,-4.839 Q6.2@-7.422,-5.54 ; Q3.2@7.422,5.667 7.422,4.966 R19.2 ; Q7.2@7.805,-5.4 R26.2
  other v2: 2.438,-6.477 3.048,-6.477 3.658,-6.477 4.267,-6.477 2.438,-5.893 3.048,-5.893 3.658,-5.893 4.267,-5.893 2.438,-5.309 3.048,-5.309 3.658,-5.309 4.267,-5.309
PPM: P3.3 U2.22 | length 13.2
  Top Layer w0.152: U2.22 2.405,5.723 v1@3.556,4.572
  Bottom Layer w0.152: v1(3.531,4.623) 3.531,2.896 2.87,2.235 2.87,0.61 3.302,0.178 5.791,0.178 6.858,-0.889 v1(6.858,-2.489)
SPI_MISO: U2.13 U4.6 U6.9 | length 13.6
  Top Layer w0.152: v1(-1.981,-1.727) -1.981,-1.376 U6.9 ; U2.13@-1.912,3.433 -1.905,3.426 v1@-1.905,2.87
  Bottom Layer w0.152: v1(-1.981,-1.727) -1.905,-1.651 -1.905,2.87 -1.905,4.013 -1.549,4.369 0.152,4.369 1.905,6.121 U4.6
  other v1: -1.905,2.921
SPI_MOSI: U2.14 U4.5 U6.24 | length 24
  Top Layer w0.152: U6.24 v1(-2.778,2.175) ; v1@-1.609,2.413 -1.397,2.625 U2.14
  Bottom Layer w0.152: v1(-2.778,2.175) -2.778,-1.921 -2.489,-2.21 -1.626,-2.21 -1.524,-2.108 v1(-1.524,2.464) ; v1@-1.499,2.464 -1.499,3.327 -0.864,3.962 0.356,3.962 2.509,6.115 2.509,9.351 2.233,9.627 0.991,9.627 0.635,9.271 U4.5@0.635,8.458
SPI_SCK: U2.12 U4.4 U6.23 | length 8.7
  Top Layer w0.152: U6.23@-2.397,1.627 v1(-2.397,2.607) U2.12
  Bottom Layer w0.152: v1(-2.397,2.607) -2.397,4.004 -1.727,4.674 -1.092,4.674 -0.635,5.131 U4.4
SWCLK: P1.3 U2.28 | length 7.6
  Top Layer w0.152: U2.28 0.603,9.468 cw(c1.292,9.468) 1.292,10.156 2.238,10.156 2.811,10.729 5.095,10.729 5.796,10.028 P1.3@5.796,9.033
SWDIO: P1.2 U2.25 | length 4.8
  Top Layer w0.254: U2.25 2.599,7.223 2.819,7.443 2.819,8.103 3.006,8.289 3.839,8.289 P1.2
TRIG: P4.2 U2.30 | length 22.3
  Top Layer w0.152: U2.30 -0.397,10.1 cw(c-0.056,10.12) -0.076,10.461 2.112,10.461 2.685,11.034 5.222,11.034 8.026,8.23 8.026,6.02 ccw(c9.804,6.02) 9.804,4.242 10.109,4.242 cw(c10.109,3.124) 11.227,3.124 11.227,0.686 11.041,0.5 P4.2
pads on no net: P1.5 P1.6 P4.5 P4.6 U2.21 U6.1 U6.2 U6.3 U6.4 U6.5 U6.6 U6.7 U6.12 U6.14 U6.15 U6.16 U6.17 U6.19 U6.21 U7.6

## Polygon pours and split planes (outlines as drawn)
BAT on Top Layer "Bottom Layer-No Net" (solid, remove dead copper, pour order 34): -12.548,-0.254 -12.548,-2.21 -14.986,-2.21 -14.986,-0.254
PGND on Top Layer "Top Layer-No Net" (solid, pour order 6): 2.159,-5.08 2.159,-6.731 4.572,-6.731 4.572,-5.08
GND on Top Layer "Bottom Layer-No Net" (solid, remove dead copper, pour order 22): -0.432,-3.073 -0.432,-8.484 1.727,-8.484 1.727,-4.978 0.914,-4.978 0.559,-4.623 0.559,-3.073
GND on Top Layer "Bottom Layer-No Net" (solid, remove dead copper, pour order 28): -4.623,-7.798 -4.115,-7.798 -4.115,-6.477 -3.81,-6.477 -3.81,-5.436 -4.877,-5.436 -4.877,-6.477 -4.623,-6.477
3.3VA on Top Layer "Bottom Layer-No Net" (solid, remove dead copper, pour order 44): -7.413,-0.625 -5.636,-0.625 -5.636,-1.992 -7.296,-1.992 -7.413,-1.875
AGND on Top Layer "Bottom Layer-No Net" (solid, remove dead copper, pour order 60): -4.877,-1.016 -4.877,-2.921 -3.658,-2.921 -3.658,-1.321 -4.394,-1.321 -4.394,-1.016
BAT on Bottom Layer "Bottom Layer-No Net" (solid, remove dead copper, pour order 32): 2.718,11.836 4.42,11.836 5.486,10.77 6.223,10.77 6.579,11.125 6.579,13.132 6.502,13.208 2.718,13.208
BAT on Bottom Layer "Bottom Layer-No Net" (solid, remove dead copper, pour order 30): -6.655,13.208 -3.099,13.208 -3.099,11.709 -4.826,11.709 -5.867,10.668 -6.223,10.668 -6.477,10.922 -6.477,11.024 -6.502,11.024 -6.579,11.1 -6.579,12.09
PGND on Bottom Layer "Bottom Layer-No Net" (solid, remove dead copper, pour order 8): 2.159,-5.029 2.159,-6.731 5.944,-6.731 5.944,-5.842 8.153,-5.842 8.153,-5.232 5.944,-5.232 5.944,-5.029
BAT on Bottom Layer "Bottom Layer-No Net" (solid, remove dead copper, pour order 10): -10.439,-0.356 -15.418,-0.356 -15.418,-2.21 -10.465,-2.21 -10.439,-2.184
BAT on Bottom Layer "Bottom Layer-No Net" (solid, remove dead copper, pour order 12): -2.997,-11.354 -2.997,-13.284 -5.766,-13.284 -6.579,-12.471 -6.579,-11.125 -6.223,-10.77 -5.232,-10.77 -5.232,-11.354
BAT on Bottom Layer "Bottom Layer-No Net" (solid, remove dead copper, pour order 14): 2.997,-11.506 2.997,-13.513 5.385,-13.513 6.604,-12.294 6.604,-11.125 5.817,-11.125 5.385,-10.693 5.309,-10.77 5.232,-10.77 5.232,-11.506
BAT on Bottom Layer "Bottom Layer-No Net" (solid, remove dead copper, pour order 16): 13.614,-0.305 10.211,-0.305 10.211,-2.083 13.614,-2.083
GND on Bottom Layer "Bottom Layer-No Net" (solid, remove dead copper, pour order 24): -4.877,-6.477 -0.483,-6.477 -0.483,-6.807 0.584,-6.807 0.584,-4.597 -4.877,-4.597
PGND on Bottom Layer "Bottom Layer-No Net" (solid, remove dead copper, pour order 68): -17.831,16.84 -18.339,16.332 -18.339,-14.986 19.075,-14.986 14.275,-10.185 14.275,17.958
GND on Signal Layer 1 "Bottom Layer-No Net" (solid, remove dead copper, pour order 74): -15.951,15.392 -16.231,15.113 -16.231,-15.85 15.062,-15.85 17.932,-12.979 17.932,15.519
3.3VD on Signal Layer 1 "Bottom Layer-No Net" (solid, pour order 48): -6.706,10.16 -6.731,10.185 -3.962,10.185 -3.962,12.725 -0.737,12.725 -0.711,12.7 4.521,12.7 4.547,12.675 4.547,4.166 10.185,4.166 10.185,2.743 -6.68,2.743 -6.706,2.718
3.3VD on Signal Layer 1 "Bottom Layer-No Net" (solid, remove dead copper, pour order 50): 10.185,4.166 10.185,4.826 8.738,4.826 8.738,10.058 3.531,10.058 3.531,4.089 3.505,4.064
3.3VA on Signal Layer 1 "Bottom Layer-No Net" (solid, remove dead copper, pour order 52): -10.592,0.559 -10.592,-4.953 -4.902,-4.953 -4.902,-3.937 1.499,-3.937 1.499,0.559
AGND on Signal Layer 2 "Bottom Layer-No Net" (solid, remove dead copper, pour order 62): -10.541,0.127 -3.327,0.127 -3.302,0.102 -3.302,-3.785 -10.541,-3.785
DGND on Signal Layer 2 "Bottom Layer-No Net" (solid, remove dead copper, pour order 70): -7.112,9.093 -7.112,0.737 4.039,0.737 4.039,7.569 6.477,7.569 6.477,9.093
GND on Signal Layer 2 "Bottom Layer-No Net" (solid, remove dead copper, pour order 72): -17.399,19.431 -16.281,18.313 -16.281,-16.104 9.804,-16.104 10.312,-16.612 22.25,-4.674 22.25,14.884 17.882,19.253

## Keep-outs
Keep-Out Layer:
  circle w0.254: c0,0 r15

## Silkscreen, mask and mechanical layers (free items; w line width, h text height)
Top Overlay:
  text "by wjy" at -11.989,4.191 h0.75
  text "17/2/26" at -12.319,2.997 h0.75